# Altium PCB Multi_HUTSCHIENE_1_1.PcbDoc (part 2 of 2)
Units mm, origin at the board's own origin, x right, y up, seen from the top; angles counter-clockwise.
Board outline 29.21 x 81.99 mm, 4 copper layers (Top Layer, 3V3, GND, Bottom Layer), stack 0.778 mm thick; 60 components, 54 nets, 683 pads, 83 vias.
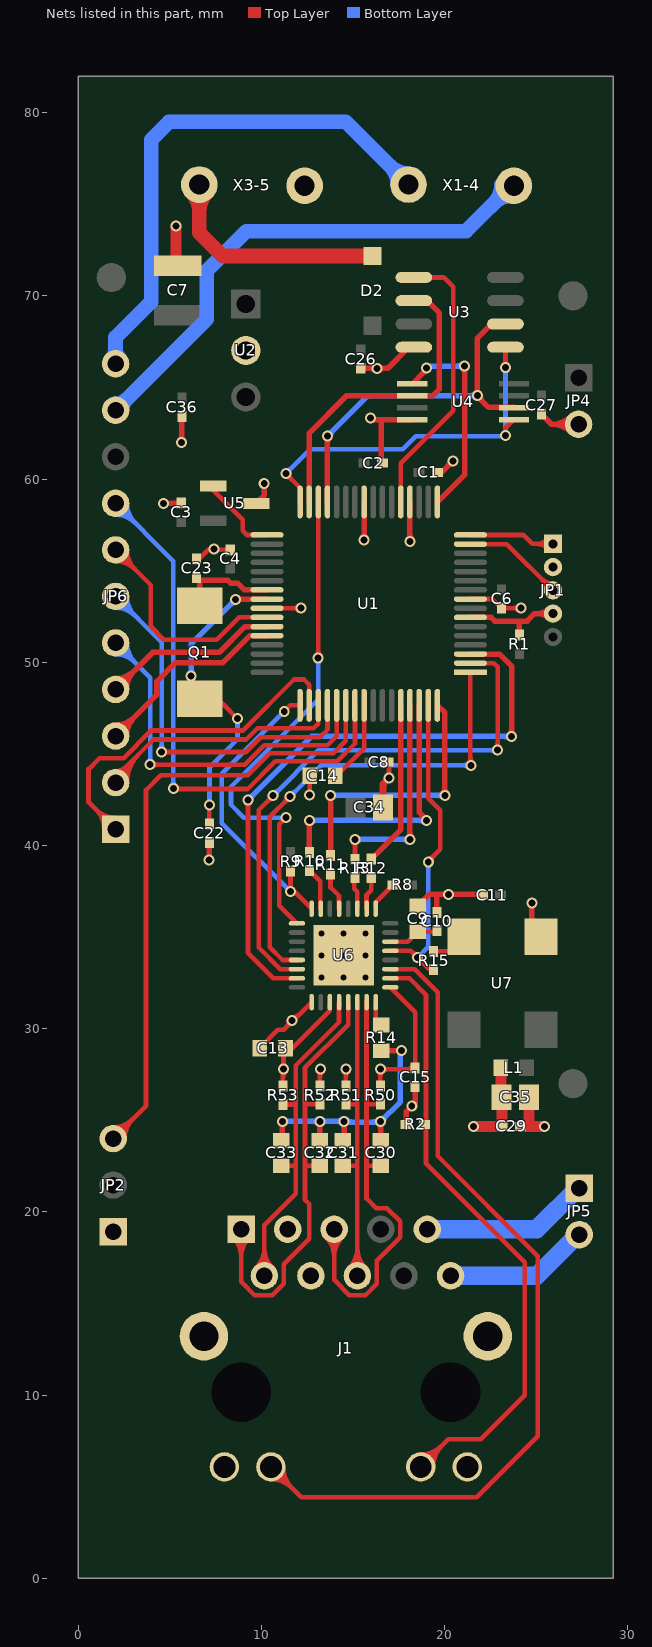
[diagram p4: the nets of this part, all layers, seen from the top]

## Via types
v1: diameter 0.6, hole 0.381, Top Layer to Bottom Layer, 74 vias
v2: diameter 0.66, hole 0.33, Top Layer to Bottom Layer, tented top, 9 vias

## Nets (pads, with @x,y where several pads share a name; then routed paths per layer and width w, separated by ;. In a path a pad name is that pad's centre, name@x,y a point inside that pad or via, vN(x,y) a via of type N, cw(c..) or ccw(c..) an arc to the next point about the centre after c; other vN are vias at no path point) (continued)
GND: C1.2 C2.2 C3.2 C4.2 C6.2 C7.2 C8.2 C9.2 C10.2 C11.2 C13.2 C14.2 C15.2 C22.2 C23.2 C26.2 C27.2 C29.2 C30.2 C31.2 C32.2 C33.2 C34.2 C35.2 C36.2 J1.12 J1.14 J1.MH1 J1.MH2 JP1.2 JP2.1 JP4.2 R2.1 R14.1 U1.9 U1.20 U1.25 U1.41 U2.2 U3.4 U4.4 U5.1 U6.25 U6.33 U7.2 X3-5.2 | length 78.6
  Top Layer w0.254: C23.2@6.439,55.491 7.087,56.139 C4.2@8.293,56.139 ; C13.2@9.904,28.943 10.895,29.934 11.216,29.934 U6.25@12.732,31.45 ; U1.41@10.3,52.95 v1(12.145,52.95) ; 11.317,30.035 ccw(c10.91,30.442) v1@11.486,30.442 ; 11.475,30.193 cw(c11.659,30.009) v1@11.659,30.269 ; v1@11.659,30.615 ccw(c11.659,31.19) 12.065,30.783 ; v1@11.832,30.442 cw(c12.092,30.442) 11.908,30.626 ; v1@12.023,52.828 ccw(c11.728,52.533) 11.728,52.95 ccw(c11.728,53.368) v1@12.023,53.073 ; C14.2@12.622,43.84 C14.2@12.622,43.815 12.622,42.762 v1(12.624,42.761) ; v1(16.954,43.688) C8.2@16.954,44.64 ; U1.9@21.4,53.45 22.605,53.45 C6.2@23.101,52.954 v1(24.163,52.954) ; v1@24.041,52.832 ccw(c23.746,52.537) 23.746,52.954 ccw(c23.746,53.372) v1@24.041,53.077
  Top Layer w0.3: v1(4.635,58.661) 4.666,58.691 C3.2@5.613,58.691 ; v1@5.533,62.106 ccw(c5.277,62.362) 5.639,62.362 ccw(c6.002,62.363) v1@5.745,62.106 ; v1(5.639,62) C36.2@5.639,63.419 ; v1(7.137,39.205) 7.137,40.132 7.163,40.157 C22.2@7.163,40.305 ; U5.1@9.709,58.674 10.147,59.112 v1(10.147,59.753) ; v1@11.032,24.837 cw(c10.776,24.581) 11.138,24.581 cw(c11.5,24.581) v1@11.244,24.837 ; C33.2@11.087,23.916 11.138,23.967 v1(11.138,24.943) ; v1@13.077,24.837 cw(c12.82,24.581) 13.183,24.581 cw(c13.545,24.581) v1@13.289,24.837 ; C32.2@13.17,23.916 13.183,23.929 v1(13.183,24.943) ; v1@14.397,24.837 cw(c14.141,24.581) 14.503,24.581 cw(c14.866,24.581) v1@14.609,24.837 ; C31.2@14.427,23.916 14.503,23.992 v1@14.503,24.905 ; C26.2@15.418,66.048 16.899,66.048 18.059,67.208 18.328,67.208 U3.4@18.315,67.196 ; v1@15.494,56.773 ccw(c15.239,57.029) 15.6,57.029 ; v1@15.6,56.714 U1.25@15.6,58.75 ; 15.6,57.031 ccw(c15.963,57.031) v1@15.706,56.773 ; 15.913,66.048 cw(c15.913,65.659) v1@16.188,65.934 ; v1(15.938,63.335) 16.025,63.249 16.519,63.249 16.54,63.228 ; 15.951,66.048 ccw(c15.951,66.383) v1@16.188,66.146 ; v1@16.391,24.824 cw(c16.135,24.568) 16.497,24.568 cw(c16.859,24.568) v1@16.603,24.824 ; v1@16.4,65.934 cw(c16.676,65.659) 16.676,66.048 ; v1@16.4,66.146 ccw(c16.637,66.383) 16.637,66.048 ; v1(16.497,24.93) 16.497,23.929 C30.2@16.51,23.916 ; R14.1@16.535,28.802 17.563,28.802 v1@17.577,28.816 ; C2.2@16.54,60.871 16.54,63.228 ; R2.1@17.89,24.778 17.89,25.459 v1(18.199,25.768) 18.377,25.946 C15.2@18.377,26.843 ; v1@17.994,56.71 ccw(c17.739,56.965) 18.1,56.965 ; 18.1,56.967 ccw(c18.463,56.967) v1@18.206,56.71 ; U1.20@18.1,58.75 18.1,56.615 v1@18.11,56.604 ; U4.4@18.231,63.249 16.561,63.249 16.54,63.228 ; C9.2@18.517,36.692 19.15,37.325 19.634,37.325 ; C10.2@19.571,36.352 19.571,37.262 19.634,37.325 ; C1.2@19.601,60.363 19.812,60.363 v1(20.447,60.998) ; v1@20.297,60.998 cw(c19.935,60.998) 20.191,60.742 cw(c20.447,60.486) v1@20.447,60.848 ; C11.2@22.055,37.325 v1(20.193,37.325) 19.634,37.325 ; v1(24.752,36.868) 24.752,35.514 U7.2@25.252,35.014 ; C27.2@25.273,63.541 25.822,62.992 JP4.2@27.305,62.992 ; JP4.2@26.881,62.568 ccw(c25.856,61.543) 25.856,62.992 ccw(c25.856,64.441) JP4.2@26.881,63.416
  Top Layer w0.4: C34.2@16.625,42.075 16.625,43.359 v1(16.954,43.688)
  Top Layer w0.6: v1(5.321,73.825) 5.321,71.759 C7.2@5.436,71.644 ; C29.2@24.122,24.663 v1(25.451,24.663) ; 24.601,24.676 C35.2@24.601,26.264
  Bottom Layer w0.3: v1(11.138,24.943) v1(13.183,24.943) 14.465,24.943 14.503,24.905 16.472,24.905 v1(16.497,24.93) 17.577,26.01 v1@17.577,28.816 ; v1@11.244,24.837 cw(c11.5,24.581) 11.5,24.943 cw(c11.5,25.305) v1@11.244,25.049 ; v1@13.077,24.837 ccw(c12.82,24.581) 12.82,24.943 ccw(c12.82,25.305) v1@13.077,25.049 ; v1@13.289,24.837 cw(c13.545,24.581) 13.545,24.943 cw(c13.545,25.305) v1@13.289,25.049 ; 14.141,24.943 ccw(c14.141,25.306) v1@14.397,25.049 ; 14.142,24.943 cw(c14.142,24.581) v1@14.397,24.837 ; v1@14.609,25.049 ccw(c14.958,25.398) 14.958,24.905 ; 16.074,24.905 ccw(c16.074,25.354) v1@16.391,25.036 ; 16.196,24.905 cw(c16.196,24.629) v1@16.391,24.824 ; v1@16.497,25.08 ccw(c16.497,25.442) 16.753,25.186 ccw(c17.009,24.93) v1@16.647,24.93
  other v1: 14.503,24.943 17.65,28.816 11.659,30.442 7.417,56.185 18.1,56.604 15.6,56.667 16.294,66.04
  other v2: 13.282,32.8 14.482,32.8 15.682,32.8 13.282,34 14.482,34 15.682,34 13.282,35.2 14.482,35.2 15.682,35.2
NetC9_1: C9.1 C10.1 U6.6 | length 2.8
  Top Layer w0.254: U6.6@17.032,34.75 17.975,34.75 C9.1@18.517,35.292 19.51,35.292 C10.1@19.571,35.352
NetC13_1: C13.1 C15.1 C29.1 C35.1 J1.3 J1.4 L1.1 R50.2 R51.2 R52.2 R53.2 U6.1 U6.27 | length 24.2
  Top Layer w0.254: v1@11.079,27.666 cw(c10.876,27.462) 11.163,27.462 ; v1@11.079,27.91 ccw(c10.784,28.206) 11.201,28.206 ccw(c11.619,28.206) v1@11.324,27.91 ; R53.2@11.163,26.865 11.163,27.75 v1(11.201,27.788) 11.201,28.84 C13.1@11.239,28.878 ; 11.163,27.278 cw(c11.711,27.278) v1@11.324,27.666 ; C13.1@11.304,28.943 C13.1@11.239,28.878 ; v1@13.086,27.665 cw(c12.852,27.431) 13.183,27.431 ; R52.2@13.183,26.878 13.183,27.762 v1(13.208,27.788) ; 13.183,27.309 cw(c13.687,27.309) v1@13.33,27.665 ; U6.27@13.732,31.45 13.732,30.979 11.632,28.878 C13.1@11.239,28.878 ; v1@14.495,27.666 cw(c14.231,27.401) 14.605,27.401 ; R51.2@14.605,26.878 14.605,27.775 v1(14.618,27.788) ; 14.605,27.34 cw(c15.066,27.34) v1@14.74,27.666 ; v1@16.362,27.666 cw(c16.067,27.37) 16.485,27.37 cw(c16.902,27.37) 16.607,27.666 cw(c16.902,27.37) 16.902,27.788 cw(c16.902,28.206) v1@16.607,27.91 ; R50.2@16.485,26.878 v1(16.485,27.788) 18.068,27.788 18.39,28.11 18.39,30.892 U6.1@17.032,32.25
  Top Layer w0.6: v1(21.577,24.663) C29.1@23.122,24.663 23.122,26.242 C35.1@23.101,26.264 23.062,26.303 L1.1@23.062,27.864
NetC14_1: C14.1 U1.56 | length 4.5
  Top Layer w0.254: C14.1@13.964,44 14.282,44 15.6,45.318 U1.56@15.6,47.65
NetC22_1: C22.1 Q1.1 U1.40 | length 19.9
  Top Layer w0.254: Q1.1@6.159,47.777 6.172,47.765 7.849,47.765 v1(8.687,46.926) ; C22.1@7.15,41.165 7.15,42.189 v1(7.163,42.202)
  Top Layer w0.3: v1@6.053,49.132 cw(c5.797,48.876) 6.159,48.876 cw(c6.522,48.876) v1@6.266,49.132 ; Q1.1@6.159,47.777 v1(6.159,49.238) ; v1(8.585,53.429) 8.607,53.45 U1.40@10.3,53.45 ; v1@8.691,53.323 cw(c8.999,53.015) 8.999,53.45 ; v1@8.691,53.535 ccw(c8.896,53.739) 8.896,53.45
  Bottom Layer w0.254: v1(7.163,42.202) 7.163,44.272 8.687,45.796 v1(8.687,46.926)
  Bottom Layer w0.3: v1@6.053,49.344 ccw(c5.767,49.631) 6.172,49.631 ; v1@6.172,49.238 6.172,51.016 v1(8.585,53.429) ; 6.172,49.569 ccw(c6.491,49.569) v1@6.266,49.344 ; v1@8.435,53.429 cw(c8.073,53.429) 8.329,53.173 cw(c8.585,52.917) v1@8.585,53.279
NetC23_1: C23.1 Q1.2 U1.39 | length 6.5
  Top Layer w0.3: Q1.2@6.159,52.857 Q1.2@6.159,53.84 ; C23.1@6.452,54.631 C23.1@6.612,54.47 ; Q1.2@6.629,53.086 6.629,54.453 C23.1@6.612,54.47 ; U1.39@10.3,53.95 9.067,53.95 8.712,54.305 8.331,54.305 8.166,54.47 C23.1@6.612,54.47
NetC30_1: C30.1 J1.5 R50.1 U6.31 | length 28.1
  Top Layer w0.254: J1.5@13.524,18.609 cw(c12.461,17.546) 13.965,17.546 cw(c15.469,17.546) J1.5@14.406,18.609 ; J1.5@13.704,18.789 cw(c13.074,18.159) 13.965,18.159 cw(c14.856,18.159) J1.5@14.226,18.789 ; J1.5@13.965,19.05 13.965,16.285 14.797,15.453 15.673,15.453 16.292,16.072 16.292,17.342 17.562,18.612 17.562,19.488 16.844,20.206 16.256,20.206 15.732,20.73 15.732,22.516 ; 15.728,22.517 15.729,22.516 15.732,22.516 ; U6.31@15.732,31.521 U6.31@15.732,31.45 15.732,25.857 ; R50.1@16.485,25.878 15.753,25.878 15.732,25.857 ; C30.1@16.51,22.516 15.732,22.516 ; 15.732,22.516 15.732,25.857
NetC31_1: C31.1 J1.6 R51.1 U6.30 | length 20.2
  Top Layer w0.254: C31.1@14.427,22.516 15.22,22.516 15.232,22.504 ; R51.1@14.605,25.878 15.227,25.878 15.232,25.883 ; J1.6@14.794,16.951 ccw(c13.738,18.007) 15.232,18.007 ; J1.6@14.974,16.771 ccw(c14.351,17.394) 15.232,17.394 ; 15.232,17.408 ccw(c16.133,17.408) J1.6@15.496,16.771 ; 15.232,18.021 ccw(c16.746,18.021) J1.6@15.676,16.951 ; U6.30@15.232,31.458 U6.30@15.232,31.45 15.232,25.883 ; J1.6@15.235,16.51 15.228,16.517 15.232,16.521 15.232,22.504 ; 15.232,22.504 15.232,25.883
NetC32_1: C32.1 J1.1 R52.1 U6.29 | length 28.2
  Top Layer w0.254: J1.1@8.444,18.609 cw(c7.381,17.546) 8.885,17.546 cw(c10.389,17.546) J1.1@9.326,18.609 ; J1.1@8.624,18.789 cw(c7.994,18.159) 8.885,18.159 cw(c9.776,18.159) J1.1@9.146,18.789 ; J1.1@8.885,19.05 8.885,16.185 9.617,15.453 10.593,15.453 11.212,16.072 11.212,17.141 12.611,18.54 12.611,20.43 12.37,20.671 12.37,22.504 ; C32.1@13.17,22.516 12.381,22.516 12.37,22.504 ; R52.1@13.183,25.878 12.413,25.878 12.37,25.921 ; U6.29@14.728,31.45 14.728,30.222 12.37,27.864 12.37,25.921 ; 12.37,22.504 12.37,25.921
NetC33_1: C33.1 J1.2 R53.1 U6.28 | length 21.9
  Top Layer w0.254: J1.2@9.714,16.951 ccw(c8.651,18.014) 10.155,18.014 ccw(c11.659,18.014) J1.2@10.596,16.951 ; J1.2@9.894,16.771 ccw(c9.264,17.401) 10.155,17.401 ccw(c11.046,17.401) J1.2@10.416,16.771 ; J1.2@10.155,16.51 10.155,19.275 11.874,20.994 11.874,22.555 ; C33.1@11.087,22.516 11.835,22.516 11.874,22.555 ; R53.1@11.163,25.865 11.854,25.865 11.874,25.845 ; U6.28@14.228,31.45 14.228,30.344 11.874,27.991 11.874,25.845 ; 11.874,22.555 11.874,25.845
NetD2_2: D2.2 X3-5.1 | length 14.9
  Top Layer w0.8: X3-5.1@6.18,75.649 cw(c5.155,74.624) 6.604,74.624 cw(c8.053,74.624) X3-5.1@7.028,75.649 ; X3-5.1@6.604,76.073 6.604,73.444 7.874,72.174 D2.2@16.053,72.174
NetJ1_9: J1.9 JP5.1 | length 9.2
  Bottom Layer w1: J1.9@19.045,19.05 25.019,19.05 JP5.1@27.305,21.336
NetJ1_10: J1.10 JP5.2 | length 7.9
  Bottom Layer w1: J1.10@20.315,16.51 25.019,16.51 JP5.2@27.305,18.796
NetJ1_11: J1.11 U6.3 | length 50.4
  Top Layer w0.254: J1.11@10.51,5.407 cw(c10.51,3.782) 11.659,4.931 cw(c12.808,6.08) J1.11@11.183,6.08 ; J1.11@10.51,5.661 cw(c10.51,4.649) 11.225,5.365 cw(c11.941,6.08) J1.11@10.929,6.08 ; J1.11@10.51,6.08 12.17,4.42 21.742,4.42 25.082,7.76 25.082,17.59 19.621,23.05 19.621,31.991 18.363,33.25 U6.3@17.032,33.25
NetJ1_13: J1.13 R2.2 U6.2 | length 37.8
  Top Layer w0.254: U6.2@17.032,32.75 18.075,32.75 18.974,31.852 18.974,22.644 24.359,17.259 24.359,9.982 21.958,7.582 20.192,7.582 J1.13@18.69,6.08 ; J1.13@18.69,6.499 ccw(c18.69,7.511) 19.405,6.795 ccw(c20.121,6.08) J1.13@19.109,6.08 ; J1.13@18.69,6.753 ccw(c18.69,8.378) 19.839,7.229 ccw(c20.988,6.08) J1.13@19.363,6.08
NetJP1_1: JP1.1 U1.16 | length 6.1
  Top Layer w0.254: U1.16@21.4,56.95 24.292,56.95 24.778,56.464 JP1.1@25.908,56.464 ; JP1.1@25.644,56.2 ccw(c25.008,55.564) 25.008,56.464 ccw(c25.008,57.365) JP1.1@25.644,56.728
NetJP1_3: JP1.3 U1.15 | length 7
  Top Layer w0.254: U1.15@21.4,56.45 23.382,56.45 JP1.3@25.908,53.924 ; JP1.3@25.535,53.924 ccw(c24.635,53.924) 25.271,54.561 ccw(c25.908,55.198) JP1.3@25.908,54.297
NetJP1_4: JP1.4 R1.1 U1.7 | length 6.9
  Top Layer w0.3: U1.7@21.4,52.45 22.531,52.45 22.733,52.248 24.13,52.248 ; R1.1@24.079,51.478 24.079,52.197 24.13,52.248 ; JP1.4@25.661,52.407 ccw(c25.063,51.809) 25.063,52.654 ccw(c25.063,53.499) JP1.4@25.661,52.902 ; JP1.4@25.908,52.654 24.905,52.654 24.498,52.248 24.13,52.248
NetJP2_3: JP2.3 U1.54 | length 37.5
  Top Layer w0.254: JP2.3@1.905,24.003 3.696,25.794 3.696,43.028 4.508,43.84 9.258,43.84 10.46,45.043 13.928,45.043 14.6,45.715 U1.54@14.6,47.65 ; JP2.3@1.905,24.372 ccw(c1.905,25.263) 2.535,24.633 ccw(c3.165,24.003) JP2.3@2.274,24.003 ; JP2.3@1.905,24.626 ccw(c1.905,26.13) 2.969,25.067 ccw(c4.032,24.003) JP2.3@2.528,24.003
NetJP6_1: JP6.1 U1.50 | length 23
  Top Layer w0.254: JP6.1@1.409,40.894 ccw(c-0.095,40.894) 0.968,41.958 ccw(c2.032,43.021) JP6.1@2.032,41.517 ; JP6.1@1.663,40.894 ccw(c0.772,40.894) 1.402,41.524 ccw(c2.032,42.154) JP6.1@2.032,41.263 ; JP6.1@2.032,40.894 0.559,42.367 0.559,44.171 1.156,44.767 2.472,44.767 3.984,46.279 8.992,46.279 11.773,49.06 12.319,49.06 12.6,48.78 U1.50@12.6,47.65
NetJP6_2: JP6.2 U1.51 | length 17.9
  Top Layer w0.254: JP6.2@2.032,43.434 2.032,43.713 4.102,45.783 9.169,45.783 9.779,46.393 12.838,46.393 13.1,46.655 U1.51@13.1,47.65 ; JP6.2@2.032,44.057 ccw(c2.032,44.887) 2.619,44.3 ; JP6.2@2.147,43.434 cw(c3.099,43.434) 2.426,44.107 ; JP6.2@2.401,43.434 cw(c3.966,43.434) 2.859,44.541 ; JP6.2@2.655,43.434 cw(c4.834,43.434) 3.293,44.974
NetJP6_3: JP6.3 U1.44 | length 13.2
  Top Layer w0.3: JP6.3@2.032,45.974 4.293,48.235 4.293,48.959 5.309,49.974 7.887,49.974 9.362,51.45 U1.44@10.3,51.45 ; JP6.3@2.032,46.574 ccw(c2.032,48.023) 3.056,46.998 ccw(c4.081,45.974) JP6.3@2.632,45.974
NetJP6_4: JP6.4 U1.43 | length 12
  Top Layer w0.3: JP6.4@2.032,48.514 4.064,50.546 7.696,50.546 9.1,51.95 U1.43@10.3,51.95 ; JP6.4@2.032,49.114 ccw(c2.032,50.563) 3.056,49.538 ccw(c4.081,48.514) JP6.4@2.632,48.514
NetJP6_5: JP6.5 U1.53 | length 25
  Top Layer w0.254: v1(3.924,44.412) 9.093,44.412 10.158,45.477 13.6,45.477 14.1,45.977 U1.53@14.1,47.65 ; v1@4.046,44.29 cw(c4.342,43.994) 4.342,44.412 cw(c4.342,44.83) v1@4.046,44.534
  Bottom Layer w0.254: JP6.5@2.032,50.431 cw(c2.032,48.927) 3.096,49.99 cw(c4.159,51.054) JP6.5@2.655,51.054 ; JP6.5@2.032,50.685 cw(c2.032,49.794) 2.662,50.424 cw(c3.292,51.054) JP6.5@2.401,51.054 ; JP6.5@2.032,51.054 3.924,49.162 v1(3.924,44.412) ; v1@3.802,44.534 ccw(c3.506,44.83) 3.924,44.83 ; 3.924,44.829 ccw(c4.341,44.829) v1@4.046,44.534
NetJP6_6: JP6.6 U1.52 | length 25.5
  Top Layer w0.254: v1@4.547,45.098 9.144,45.098 9.957,45.91 13.183,45.91 13.6,46.327 U1.52@13.6,47.65 ; v1@4.669,44.988 cw(c4.934,44.723) 4.934,45.098 ; v1@4.669,45.233 ccw(c4.995,45.559) 4.995,45.098
  Bottom Layer w0.254: JP6.6@2.032,52.971 cw(c2.032,51.467) 3.096,52.53 cw(c4.159,53.594) JP6.6@2.655,53.594 ; JP6.6@2.032,53.225 cw(c2.032,52.334) 2.662,52.964 cw(c3.292,53.594) JP6.6@2.401,53.594 ; JP6.6@2.032,53.594 4.547,51.079 v1(4.547,45.11) ; v1@4.424,45.233 ccw(c4.129,45.528) 4.547,45.528 ccw(c4.964,45.528) v1@4.669,45.233
NetJP6_7: JP6.7 U1.42 | length 15.9
  Top Layer w0.254: JP6.7@2.032,55.511 cw(c2.032,54.007) 3.096,55.07 cw(c4.159,56.134) JP6.7@2.655,56.134 ; JP6.7@2.032,55.765 cw(c2.032,54.874) 2.662,55.504 cw(c3.292,56.134) JP6.7@2.401,56.134 ; JP6.7@2.032,56.134 3.95,54.216 3.95,51.956 4.674,51.232 7.556,51.232 8.775,52.45 U1.42@10.3,52.45
NetJP6_8: JP6.8 U1.55 | length 35
  Top Layer w0.254: v1@5.194,43.116 5.194,43.078 9.233,43.078 10.757,44.602 14.135,44.602 15.1,45.567 U1.55@15.1,47.65 ; v1@5.304,42.994 cw(c5.508,42.791) 5.508,43.078 ; v1@5.304,43.239 ccw(c5.692,43.626) 5.692,43.078
  Bottom Layer w0.254: JP6.8@2.032,58.051 cw(c2.032,56.547) 3.096,57.61 cw(c4.159,58.674) JP6.8@2.655,58.674 ; JP6.8@2.032,58.305 cw(c2.032,57.414) 2.662,58.044 cw(c3.292,58.674) JP6.8@2.401,58.674 ; JP6.8@2.032,58.674 5.182,55.524 5.182,43.129 v1@5.194,43.116 ; v1@5.06,43.239 ccw(c4.765,43.533) 5.182,43.533 ; 5.182,43.535 ccw(c5.601,43.535) v1@5.304,43.239
  other v1: 5.182,43.116
NetJP6_10: JP6.10 X1-4.2 | length 31.9
  Bottom Layer w0.8: JP6.10@2.032,63.754 7.01,68.732 7.01,71.374 9.169,73.533 21.158,73.533 X1-4.2@23.698,76.073 ; JP6.10@2.032,64.104 ccw(c2.032,64.949) 2.629,64.351 ccw(c3.227,63.754) JP6.10@2.382,63.754 ; X1-4.2@23.098,76.073 cw(c21.65,76.073) 22.674,75.049 cw(c23.698,74.024) X1-4.2@23.698,75.473
NetJP6_11: JP6.11 X1-4.1 | length 32.5
  Bottom Layer w0.8: JP6.11@1.785,66.541 ccw(c1.187,67.139) 2.032,67.139 ccw(c2.877,67.139) JP6.11@2.279,66.541 ; JP6.11@2.032,66.294 2.032,67.744 3.975,69.687 3.975,78.524 4.953,79.502 14.605,79.502 X1-4.1@18.034,76.073 ; X1-4.1@17.434,76.073 ccw(c15.985,76.073) 17.01,77.097 ccw(c18.034,78.122) X1-4.1@18.034,76.673
NetR8_1: R8.1 U6.9 | length 1.7
  Top Layer w0.254: U6.9@16.232,36.55 16.232,36.9 R8.1@17.178,37.846
NetR9_1: R9.1 U1.49 U6.16 | length 16.5
  Top Layer w0.254: v1(11.239,47.32) 11.57,47.65 U1.49@12.1,47.65 ; R9.1@11.582,38.603 v1(11.582,37.478) 11.804,37.478 U6.16@12.732,36.55
  Bottom Layer w0.254: v1(11.239,47.32) 7.836,43.917 7.836,41.224 v1(11.582,37.478)
NetR10_1: R10.1 U6.15 | length 2.3
  Top Layer w0.254: R10.1@12.624,38.629 13.21,38.043 13.21,36.572 U6.15@13.232,36.55
NetR10_2: R10.2 U1.62 | length 16.7
  Top Layer w0.3: v1@12.505,41.258 cw(c12.249,41.002) 12.611,41.002 cw(c12.973,41.002) v1@12.717,41.258 ; v1(12.611,41.364) 12.611,39.641 R10.2@12.624,39.629 ; U1.62@18.6,47.65 18.6,41.814 18.999,41.415 v1(18.999,41.364) ; 18.707,41.707 cw(c18.364,41.364) v1@18.849,41.364
  Bottom Layer w0.3: v1(12.611,41.364) v1(18.999,41.364) ; v1@12.717,41.258 cw(c12.973,41.002) 12.973,41.364 cw(c12.973,41.726) v1@12.717,41.47 ; v1@18.893,41.258 ccw(c18.637,41.002) 18.637,41.364 ccw(c18.637,41.726) v1@18.893,41.47
NetR11_1: R11.1 U6.13 | length 2.1
  Top Layer w0.254: R11.1@13.767,38.451 13.767,37.706 14.232,37.241 U6.13@14.232,36.55
NetR11_2: R11.2 U1.64 | length 16.9
  Top Layer w0.3: v1@13.661,42.63 cw(c13.405,42.374) 13.767,42.374 ; R11.2@13.767,39.451 v1(13.767,42.736) ; 13.767,42.373 cw(c14.13,42.373) v1@13.873,42.63 ; U1.64@19.6,47.65 20.002,47.247 v1(20.002,42.735) ; v1@19.896,42.842 ccw(c19.64,43.098) 20.002,43.098 ccw(c20.365,43.098) v1@20.109,42.842
  Bottom Layer w0.3: v1(13.767,42.736) v1(20.002,42.735) ; v1@13.873,42.63 cw(c14.128,42.375) 14.128,42.735 ; v1@13.873,42.842 ccw(c14.13,43.099) 14.13,42.735 ; v1@19.896,42.629 ccw(c19.64,42.373) 19.64,42.735 ccw(c19.64,43.098) v1@19.896,42.842
NetR12_1: R12.1 U1.60 | length 9.1
  Top Layer w0.3: R12.1@15.989,39.26 17.6,40.871 U1.60@17.6,47.65
NetR12_2: R12.2 U6.10 | length 1.8
  Top Layer w0.254: U6.10@15.732,36.55 15.732,37.309 15.989,37.567 R12.2@15.989,38.26
NetR13_1: R13.1 U6.11 | length 1.8
  Top Layer w0.254: R13.1@15.062,38.21 15.062,37.643 15.232,37.473 U6.11@15.232,36.55
  Top Layer w0.3: R13.1@15.062,38.21 R13.1@15.1,38.248
NetR13_2: R13.2 U1.61 | length 13.9
  Top Layer w0.254: v1@14.978,40.2 cw(c14.683,39.905) 15.1,39.905 cw(c15.518,39.905) v1@15.223,40.2 ; R13.2@15.1,39.248 v1(15.1,40.322)
  Top Layer w0.3: v1@17.994,40.428 ccw(c17.737,40.684) 18.1,40.684 ccw(c18.462,40.684) v1@18.206,40.428 ; U1.61@18.1,47.65 v1(18.1,40.322) v1@18.125,40.337
  Bottom Layer w0.3: v1(15.1,40.322) 15.088,40.322 15.097,40.328 v1@15.113,40.337 ; v1@15.206,40.216 cw(c15.498,39.925) 15.498,40.337 ; v1@15.206,40.429 ccw(c15.427,40.649) 15.427,40.337 ; 17.701,40.337 cw(c17.701,39.923) v1@17.994,40.216 ; 17.774,40.337 ccw(c17.774,40.647) v1@17.994,40.428 ; v1@18.125,40.337 v1@15.113,40.337 ; v1@15.113,40.337 15.111,40.321 v1@15.113,40.337
NetR14_2: R14.2 U6.32 | length 1.4
  Top Layer w0.254: R14.2@16.232,30.505 U6.32@16.232,31.45
  Top Layer w0.3: R14.2@16.232,30.505 R14.2@16.535,30.202
NetR15_1: R15.1 U7.3 | length 3.2
  Top Layer w0.254: R15.1@19.393,34.218 21.422,34.218 21.497,34.293 21.497,34.976 U7.3@21.238,35.234
NetR15_2: R15.2 U1.63 U6.5 | length 20
  Top Layer w0.254: U6.5@17.032,34.25 18.15,34.25 v1(18.517,33.884) 19.164,33.236 R15.2@19.439,33.236 ; v1@18.344,33.884 ccw(c17.926,33.884) 18.221,34.179 ccw(c18.517,34.474) v1@18.517,34.057 ; v1@18.517,33.711 cw(c18.517,33.293) 18.812,33.588 cw(c19.107,33.884) v1@18.69,33.884 ; v1@19.1,39.276 ccw(c19.1,39.629) 19.349,39.38 ; U1.63@19.1,47.65 19.1,42.584 19.761,41.923 19.761,39.792 19.1,39.13 v1@19.126,39.103 ; v1@19.273,39.103 cw(c19.756,39.103) 19.414,39.445
  Bottom Layer w0.254: v1(18.517,33.884) 19.1,34.467 v1@19.1,39.054 ; v1@18.978,38.981 cw(c18.682,38.686) 19.1,38.686 cw(c19.518,38.686) v1@19.222,38.981 ; v1@19.05,39.054 v1(19.1,39.103)
NetU1_1: U1.1 U6.21 | length 28.7
  Top Layer w0.254: v1@11.384,42.672 cw(c10.966,42.672) 11.262,42.377 cw(c11.557,42.081) v1@11.557,42.499 ; v1(11.557,42.672) 10.452,41.567 10.452,34.442 11.144,33.75 U6.21@11.932,33.75 ; v1@21.303,44.496 ccw(c21.068,44.73) 21.4,44.73 ; 21.4,44.853 ccw(c21.904,44.853) v1@21.547,44.496 ; U1.1@21.4,49.45 21.4,44.399 v1(21.425,44.374)
  Bottom Layer w0.254: v1(11.557,42.672) 13.259,44.374 v1(21.425,44.374) ; v1@11.557,42.845 ccw(c11.557,43.263) 11.852,42.967 ccw(c12.148,42.672) v1@11.73,42.672 ; v1@21.303,44.251 ccw(c21.007,43.956) 21.007,44.374 ccw(c21.007,44.791) v1@21.303,44.496
NetU1_2: U1.2 U6.22 | length 33.2
  Top Layer w0.254: v1@10.457,42.723 cw(c10.039,42.723) 10.335,42.427 cw(c10.63,42.132) v1@10.63,42.55 ; v1(10.63,42.723) 9.842,41.935 9.842,34.43 11.022,33.25 U6.22@11.932,33.25 ; U1.2@21.4,49.95 22.681,49.95 22.885,49.746 v1(22.885,45.199) ; v1@22.763,45.322 ccw(c22.468,45.617) 22.885,45.617 ccw(c23.303,45.617) v1@23.008,45.322
  Bottom Layer w0.254: v1(10.63,42.723) 13.106,45.199 v1(22.885,45.199) ; v1@10.63,42.896 ccw(c10.63,43.313) 10.925,43.018 ccw(c11.221,42.723) v1@10.803,42.723 ; v1@22.763,45.077 ccw(c22.468,44.782) 22.468,45.199 ccw(c22.468,45.617) v1@22.763,45.322
NetU1_3: U1.3 U6.23 | length 36.1
  Top Layer w0.254: v1@9.136,42.346 cw(c8.841,42.051) 9.258,42.051 cw(c9.676,42.051) v1@9.381,42.346 ; v1@9.271,42.469 v1(9.258,42.469) 9.258,34.138 10.646,32.75 U6.23@11.932,32.75
  Top Layer w0.3: U1.3@21.4,50.45 22.981,50.45 23.647,49.784 v1(23.647,45.949) ; v1@23.541,46.055 ccw(c23.285,46.311) 23.647,46.311 ccw(c24.01,46.311) v1@23.753,46.055
  Bottom Layer w0.3: v1(9.258,42.469) v1@9.271,42.469 ; v1@9.258,42.619 ccw(c9.258,42.981) 9.514,42.725 ccw(c9.77,42.469) v1@9.408,42.469 ; v1@9.265,42.475 12.738,45.949 v1(23.647,45.949) ; v1@23.541,45.843 ccw(c23.285,45.586) 23.285,45.949 ccw(c23.285,46.311) v1@23.541,46.055
NetU1_17: U1.17 U4.1 | length 12.5
  Top Layer w0.3: U4.1@18.231,65.199 18.898,65.866 18.898,66.065 v1(18.999,66.065) ; U1.17@19.6,58.75 21.082,60.233 v1(21.082,66.167) ; v1@20.976,66.061 cw(c20.72,65.805) 21.082,65.805 cw(c21.444,65.805) v1@21.188,66.061
  Bottom Layer w0.3: v1(18.999,66.065) 19.101,66.167 v1(21.082,66.167) ; v1@20.976,66.061 ccw(c20.72,65.805) 20.72,66.167 ccw(c20.72,66.529) v1@20.976,66.273
NetU1_21: U1.21 U3.1 | length 15.3
  Top Layer w0.254: U1.21@17.6,58.75 17.6,60.868 20.46,63.729 20.46,70.498 19.952,71.006 U3.1@18.315,71.006
NetU1_29: U1.29 U3.6 U4.6 | length 22.6
  Top Layer w0.3: v1@13.494,62.238 cw(c13.239,61.983) 13.6,61.983 ; U1.29@13.6,58.75 v1(13.6,62.344) ; 13.6,61.981 cw(c13.963,61.981) v1@13.706,62.238 ; v1@21.674,64.66 ccw(c21.449,64.886) 21.768,64.886 ; v1@21.768,64.529 22.39,63.906 23.773,63.906 U4.6@23.781,63.899 ; v1@21.768,64.554 21.768,67.678 22.555,68.466 U3.6@23.315,68.466 ; 21.768,64.947 ccw(c22.173,64.947) v1@21.887,64.66 ; v1@21.93,64.554 ccw(c22.385,64.554) 22.064,64.233
  Bottom Layer w0.3: v1(13.6,62.344) 15.809,64.554 v1(21.78,64.554) ; v1@13.6,62.494 ccw(c13.6,62.855) 13.855,62.6 ; v1@13.75,62.344 cw(c14.113,62.344) 13.856,62.601 ; v1@21.674,64.448 ccw(c21.418,64.192) 21.418,64.554 ccw(c21.418,64.916) v1@21.674,64.66
NetU1_30: U1.30 U6.17 | length 29.4
  Top Layer w0.254: v1(11.341,41.516) 10.975,41.151 10.975,36.707 U6.17@11.932,35.75 ; v1@12.971,50.364 ccw(c12.662,50.673) 13.1,50.673 ; v1(13.094,50.241) 13.1,50.235 U1.30@13.1,58.75 ; 13.1,50.645 ccw(c13.497,50.645) v1@13.216,50.364
  Bottom Layer w0.254: v1(11.341,41.516) 9.03,41.516 8.331,42.215 8.331,43.205 13.094,47.968 v1(13.094,50.241) ; v1@12.971,50.119 cw(c12.676,49.824) 13.094,49.824 cw(c13.511,49.824) v1@13.216,50.119
NetU1_31: U1.31 U3.2 U4.2 | length 17.7
  Top Layer w0.3: U1.31@12.6,58.75 12.6,62.498 14.651,64.549 U4.2@18.231,64.549 18.238,64.541 19.342,64.541 19.71,64.91 19.71,69.063 19.037,69.736 U3.2@18.315,69.736
NetU1_32: U1.32 U3.5 U4.5 | length 23.2
  Top Layer w0.254: v1@11.328,60.127 cw(c11.328,59.709) 11.624,60.004 cw(c11.919,60.3) v1@11.501,60.3 ; v1@11.367,60.338 v1(11.328,60.3) 12.1,59.528 U1.32@12.1,58.75 ; v1@23.193,66.224 ccw(c22.898,66.519) 23.315,66.519 ccw(c23.733,66.519) v1@23.438,66.224 ; v1(23.304,62.37) 23.304,62.773 U4.5@23.781,63.249 ; v1(23.315,66.102) U3.5@23.315,67.196
  Bottom Layer w0.254: v1(11.328,60.3) 12.662,61.633 17.704,61.633 18.415,62.344 23.089,62.344 23.315,62.571 v1(23.315,66.102) ; v1@11.328,60.473 ccw(c11.328,60.89) 11.624,60.595 ccw(c11.919,60.3) v1@11.501,60.3 ; v1@23.193,65.979 cw(c22.898,65.684) 23.315,65.684 cw(c23.733,65.684) v1@23.438,65.979
NetU1_33: U1.33 U5.3 | length 4.5
  Top Layer w0.254: U5.3@7.359,59.624 7.359,59.392 8.966,57.785 8.966,57.188 9.204,56.95 U1.33@10.3,56.95
pads on no net: J1.7 J1.8 J1.MH3 J1.MH4 M1.0 M2.0 M3.0 U1.4 U1.5 U1.6 U1.8 U1.11 U1.12 U1.13 U1.14 U1.18 U1.22 U1.23 U1.24 U1.27 U1.28 U1.34 U1.35 U1.36 U1.37 U1.45 U1.46 U1.47 U1.48 U1.58 U1.59 U4.3 U6.4 U6.7 U6.8 U6.14 U6.18 U6.19 U6.20 U6.24 U6.26

## Polygon pours and split planes (outlines as drawn)
GND on Bottom Layer "GND" (solid, pour order 9): 9.525,37.046 9.525,30.124 19.304,30.124 18.796,30.124 18.796,37.02
GND on GND "GND" (solid, pour order 5): 1.46,1.295 28.384,1.295 28.384,80.835 0.648,80.835 0.648,1.295
NetC13_1 on 3V3 "C13_1" (solid, pour order 2): 7.836,30.975 12.014,33.503 19.05,33.503 22.568,29.451 22.568,13.284 7.836,13.284 7.836,30.975
3V3 on 3V3 "C13_1" (solid, pour order 3): 1.283,14.186 7.506,14.186 7.506,31.598 11.849,34.15 19.05,34.138 23.444,29.388 23.444,14.186 28.207,14.186 28.207,77.381 1.194,77.381 1.283,77.381 1.283,14.186

## Other copper
Top Layer:
  text "MN7" at 21.615,41.059 h2.2
  text "Main1.1" at 2.515,3.988 h1.27 r90
  text "PN10007" at 4.369,3.899 h1.3 r90

## Silkscreen, mask and mechanical layers (free items; w line width, h text height)
Top Solder:
  text "MN7" at 21.615,41.059 h2.2
Poly1:
  lines w0.05: 1.27,14.186 7.493,14.186 7.493,31.585 11.811,34.125 19.05,34.125 22.86,30.188 28.575,30.188 28.448,77.432 1.27,77.432 1.27,14.186 ; 7.836,13.322 20.155,13.322 20.155,19.291 22.568,19.291 22.568,29.451 19.012,33.515 12.027,33.515 7.836,30.975 7.836,13.322
Fail:
  lines w0.05: -3.645,61.798 8.979,61.798 8.979,79.07 -3.645,79.07 -3.645,61.798 ; 19.05,25.336 19.05,40.056 35.192,40.056 35.192,25.336 19.05,25.336
Mechanical 13:
  drawing of 212 lines, arcs and shapes, not listed
Mechanical 15:
  drawing of 255 lines, arcs and shapes, not listed
Outline:
  the board outline again, w0.254

## Dimensions
0,0 to 2.032,40.894 on Mechanical 1